# Altium PCB CRF18-1.PcbDoc (part 1 of 2)
Units mm, origin at the board's own origin, x right, y up, seen from the top; angles counter-clockwise.
Board outline 161.4 x 100 mm, 4 copper layers (Top Layer, Internal Plane 1, Internal Plane 2, Bottom Layer), stack 1.503 mm thick; 213 components, 165 nets, 674 pads, 349 vias.
Unrouted connection lines stored in the file: 9.
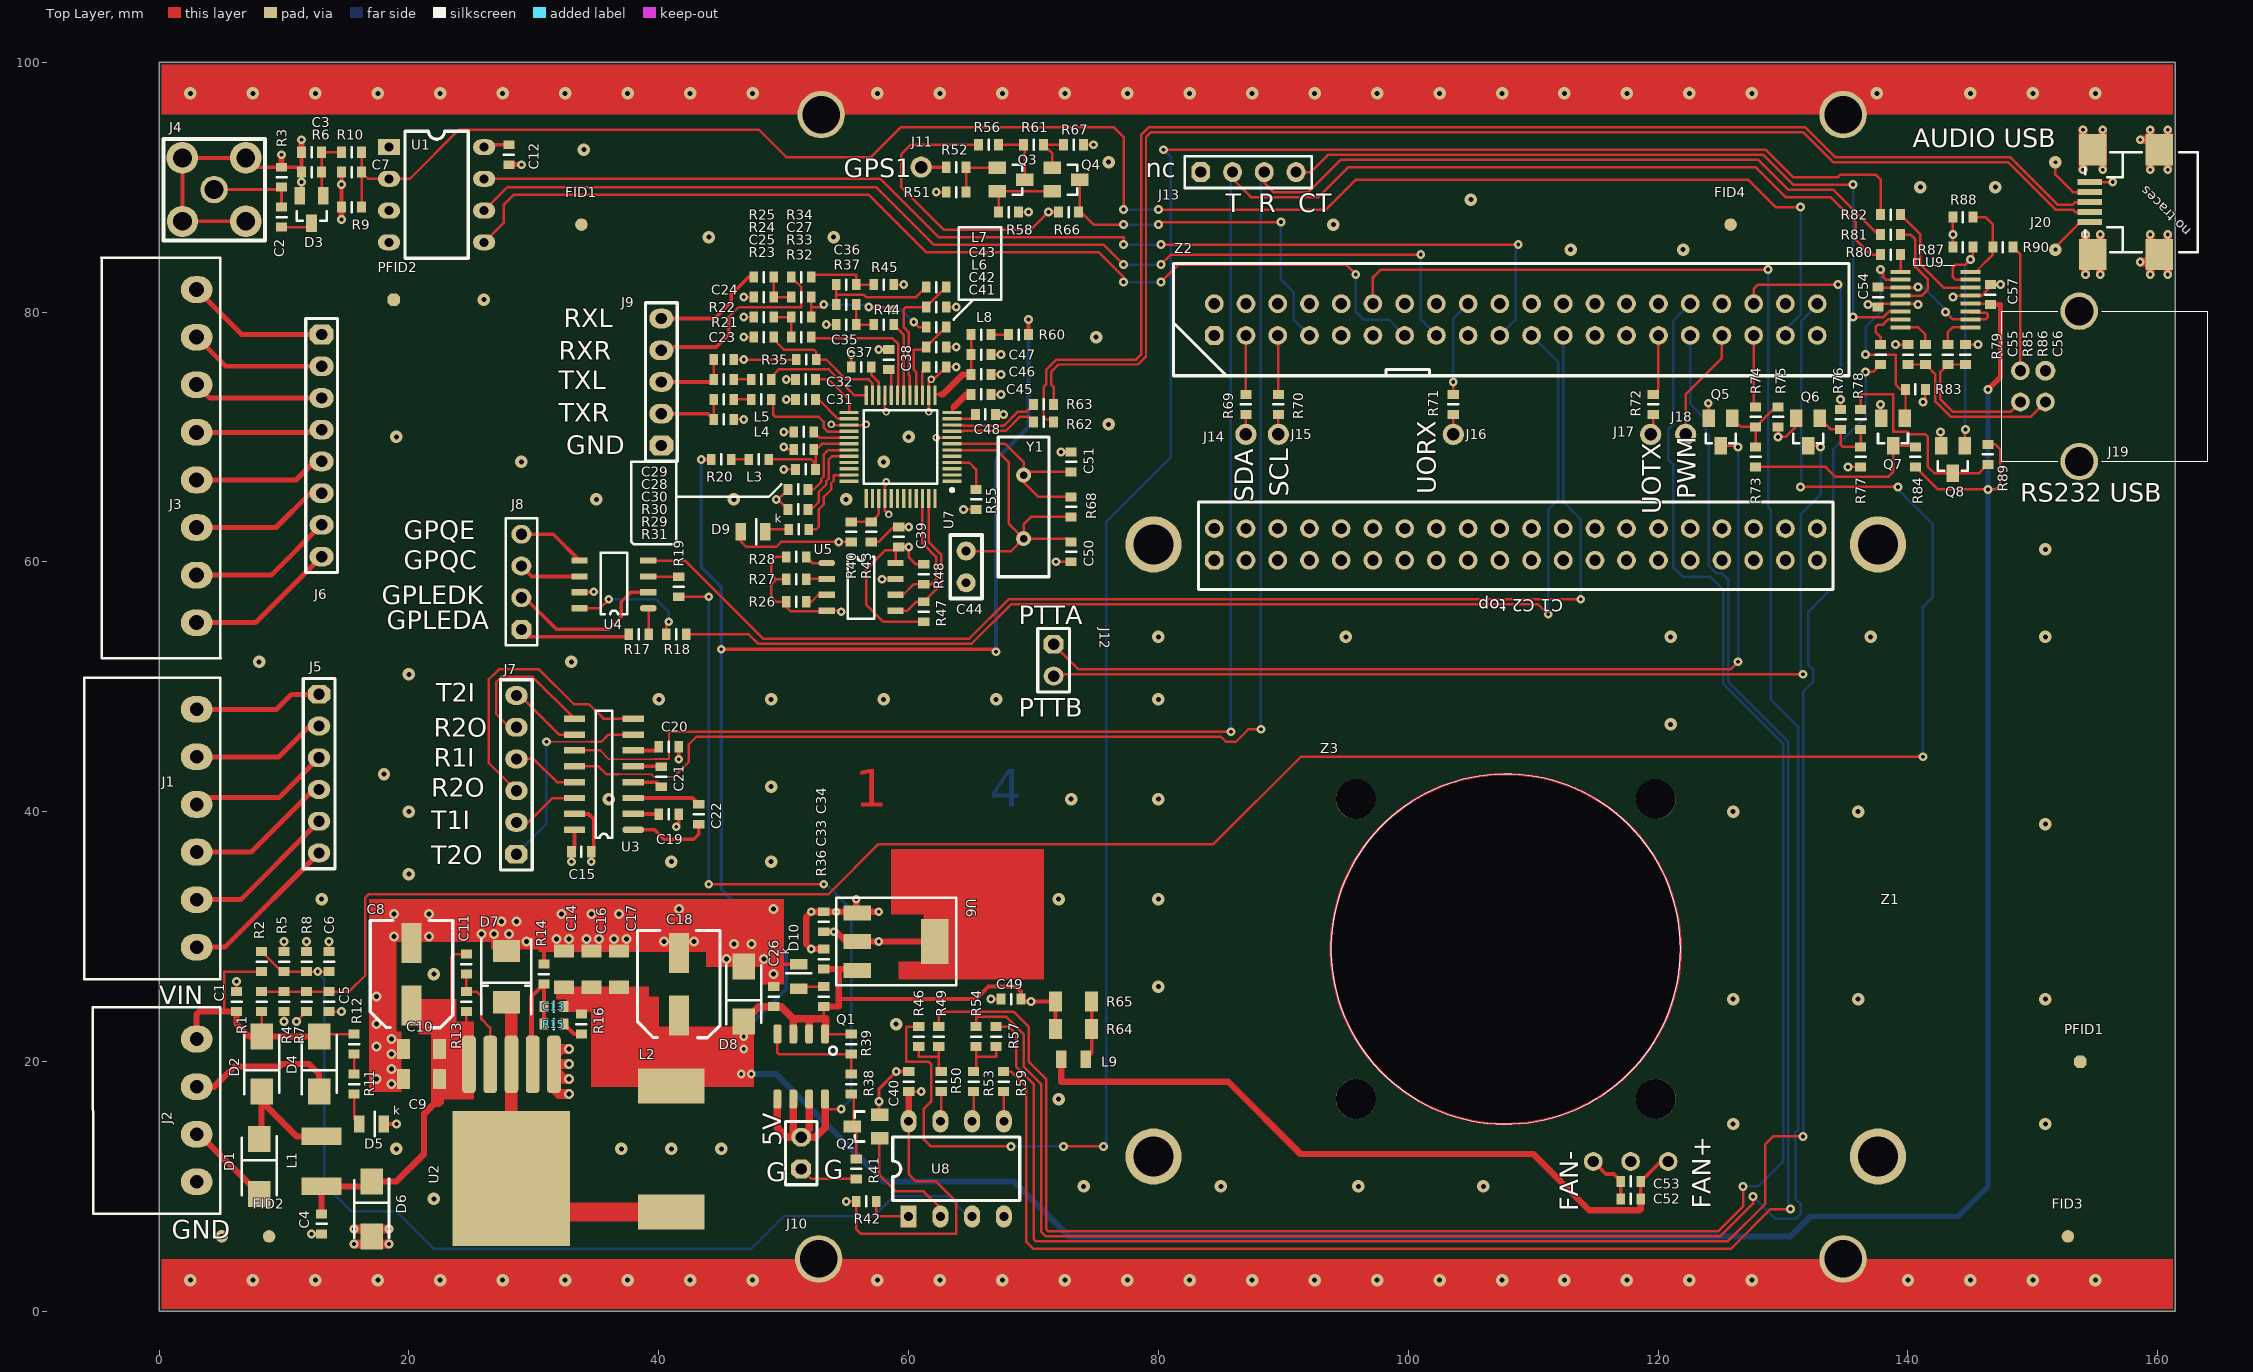
[diagram p0: Top Layer view]
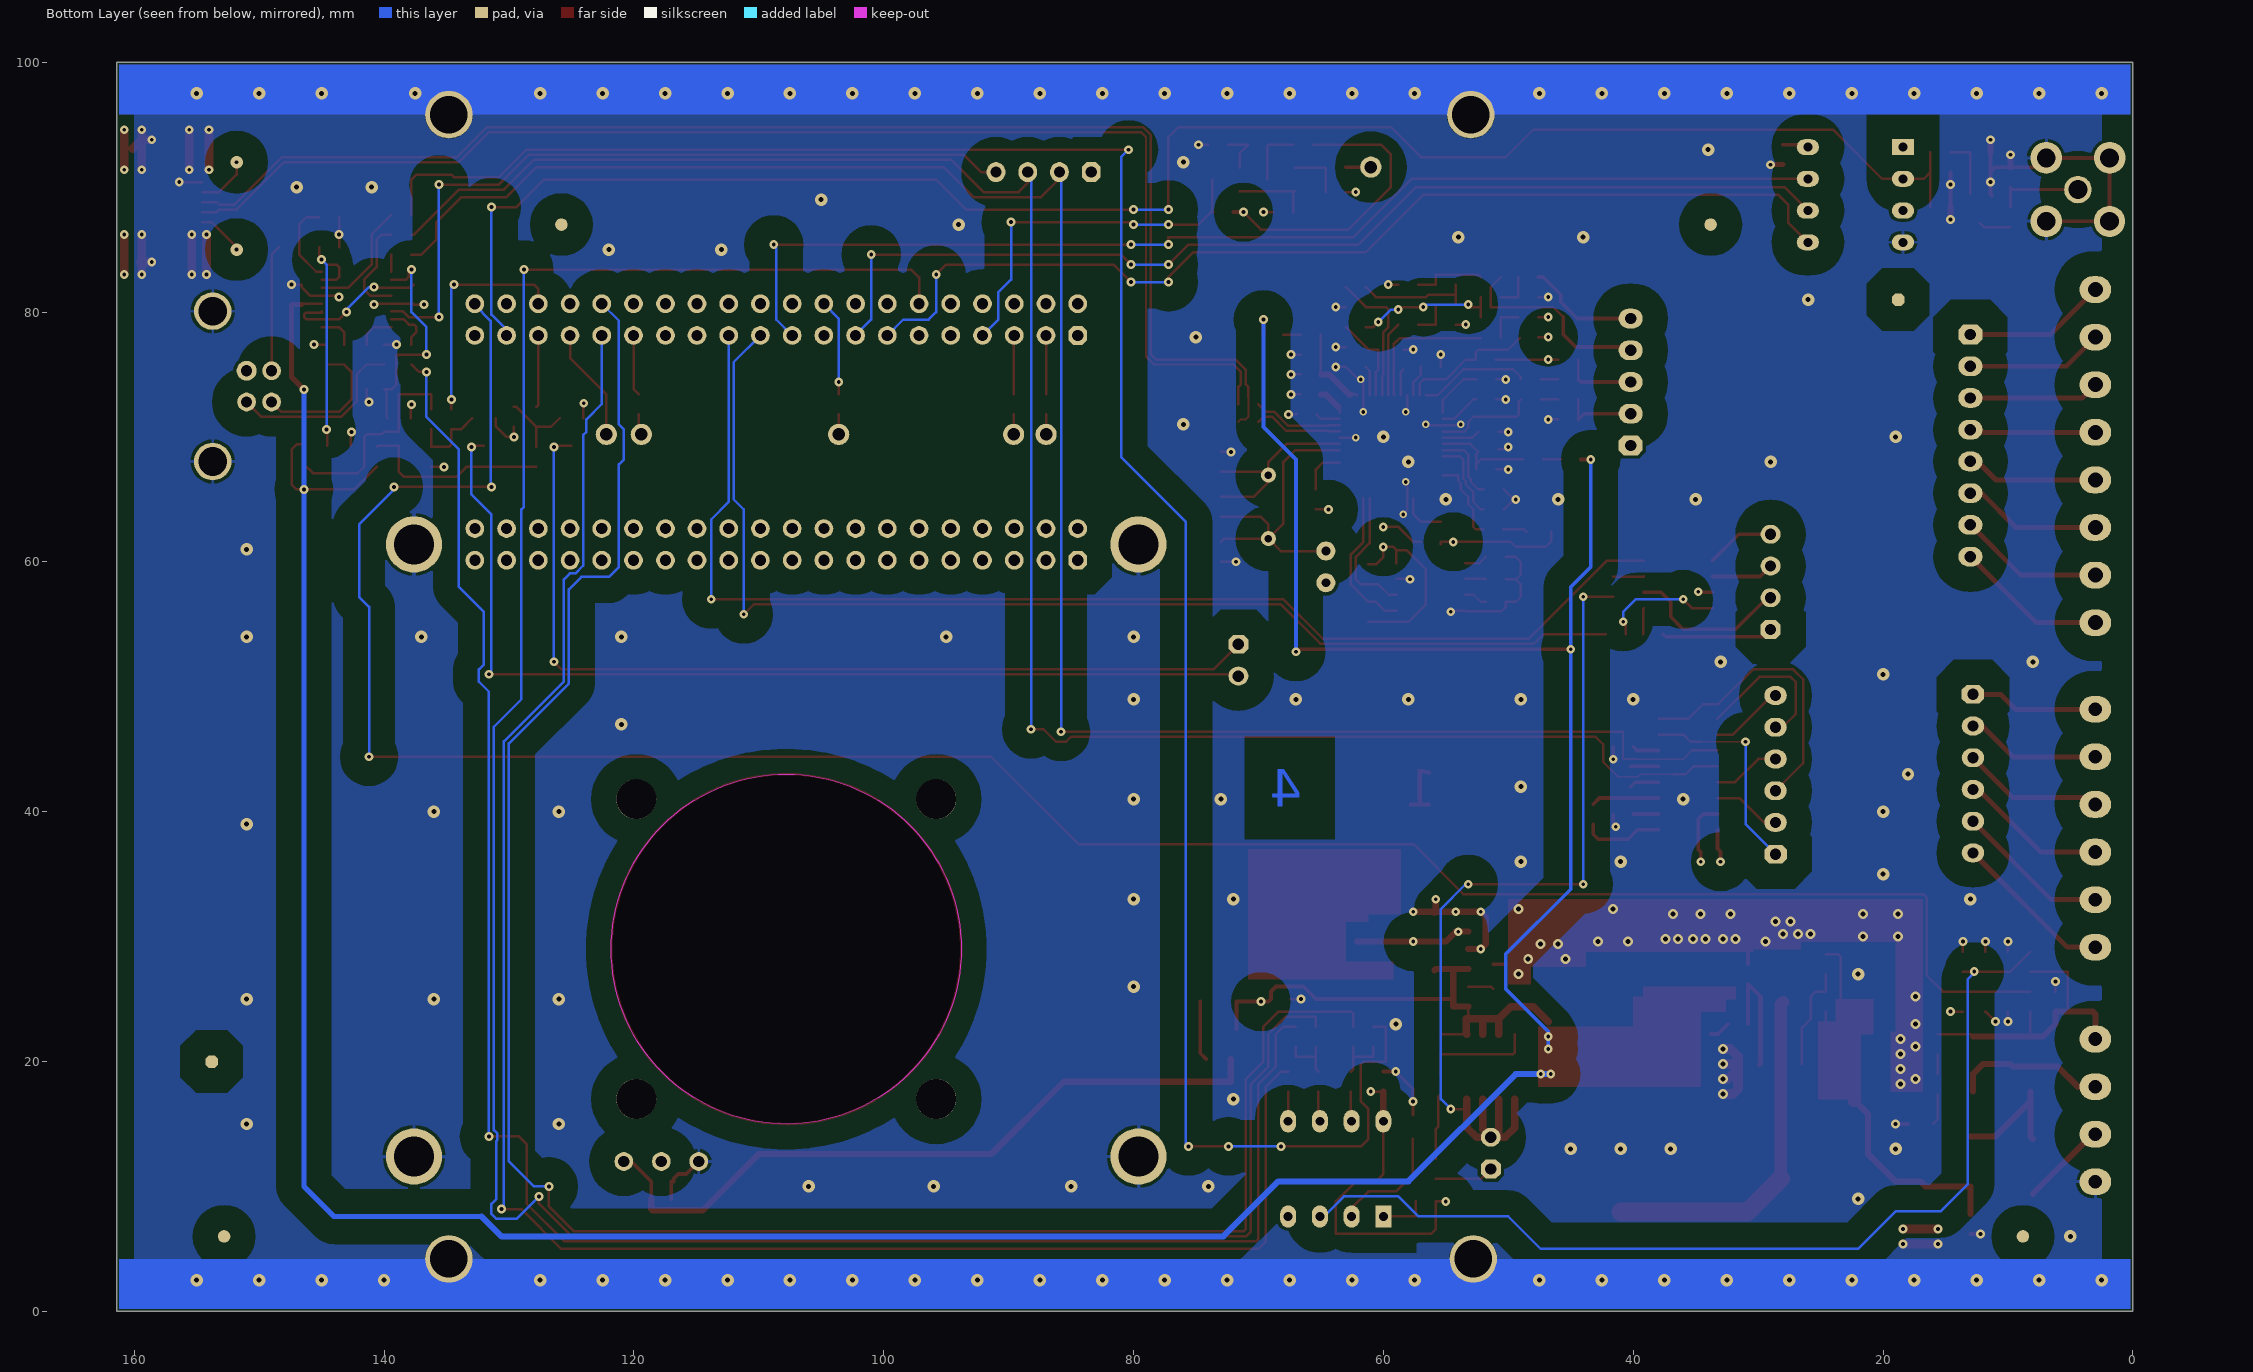
[diagram p1: Bottom Layer view, seen from below]
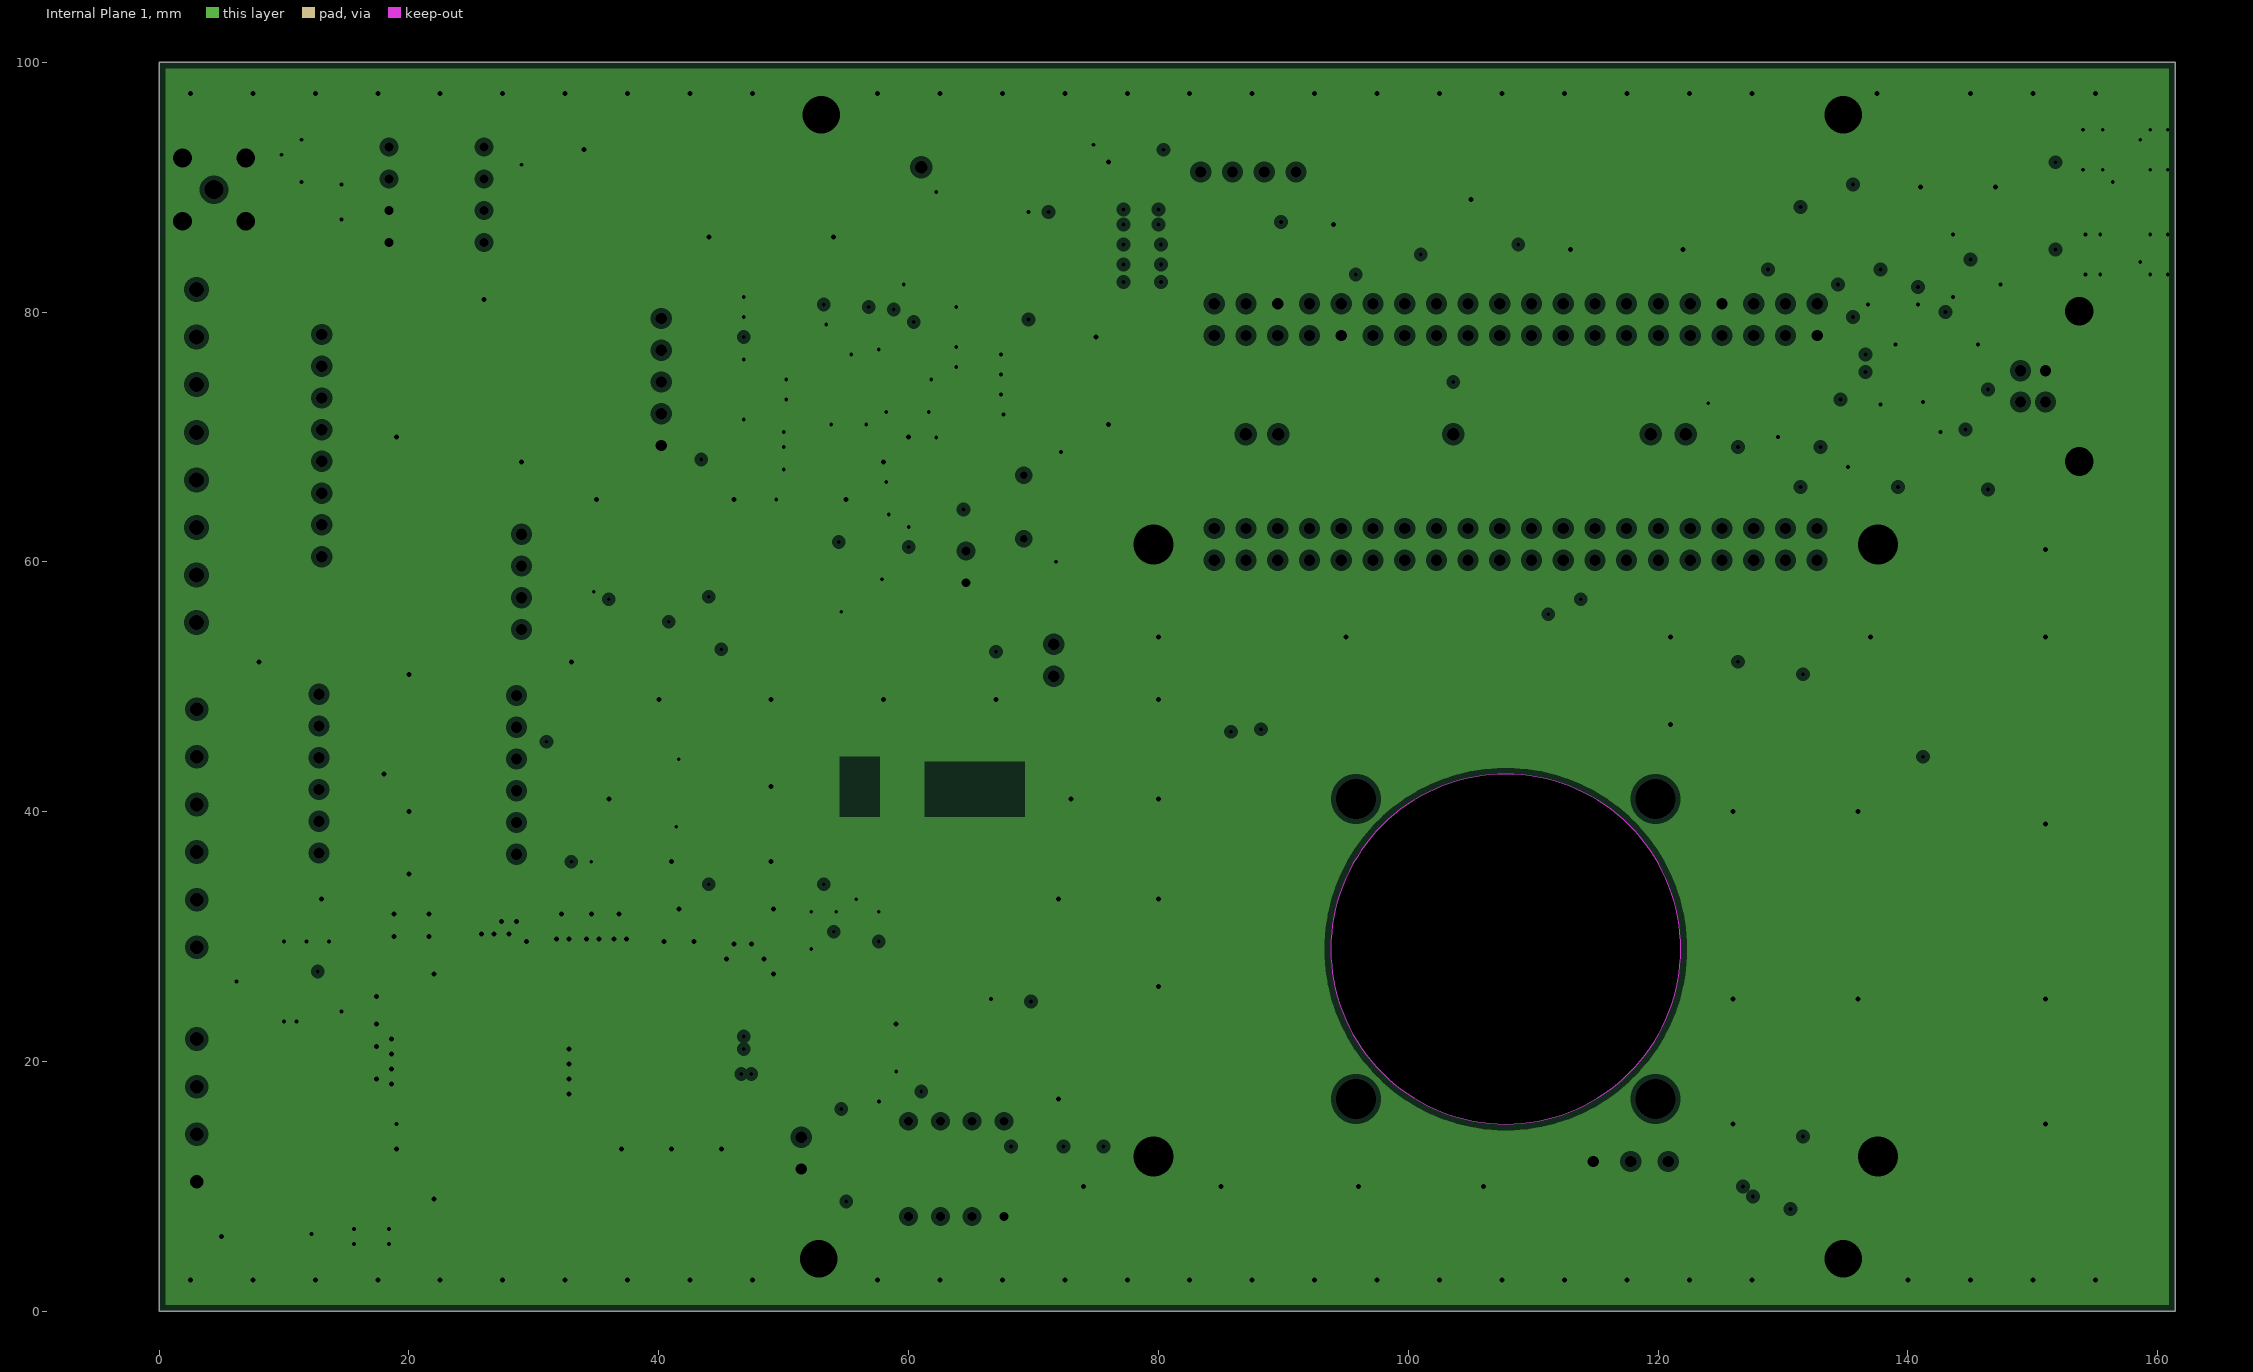
[diagram p2: Internal Plane 1, clearances drawn from the general rule]
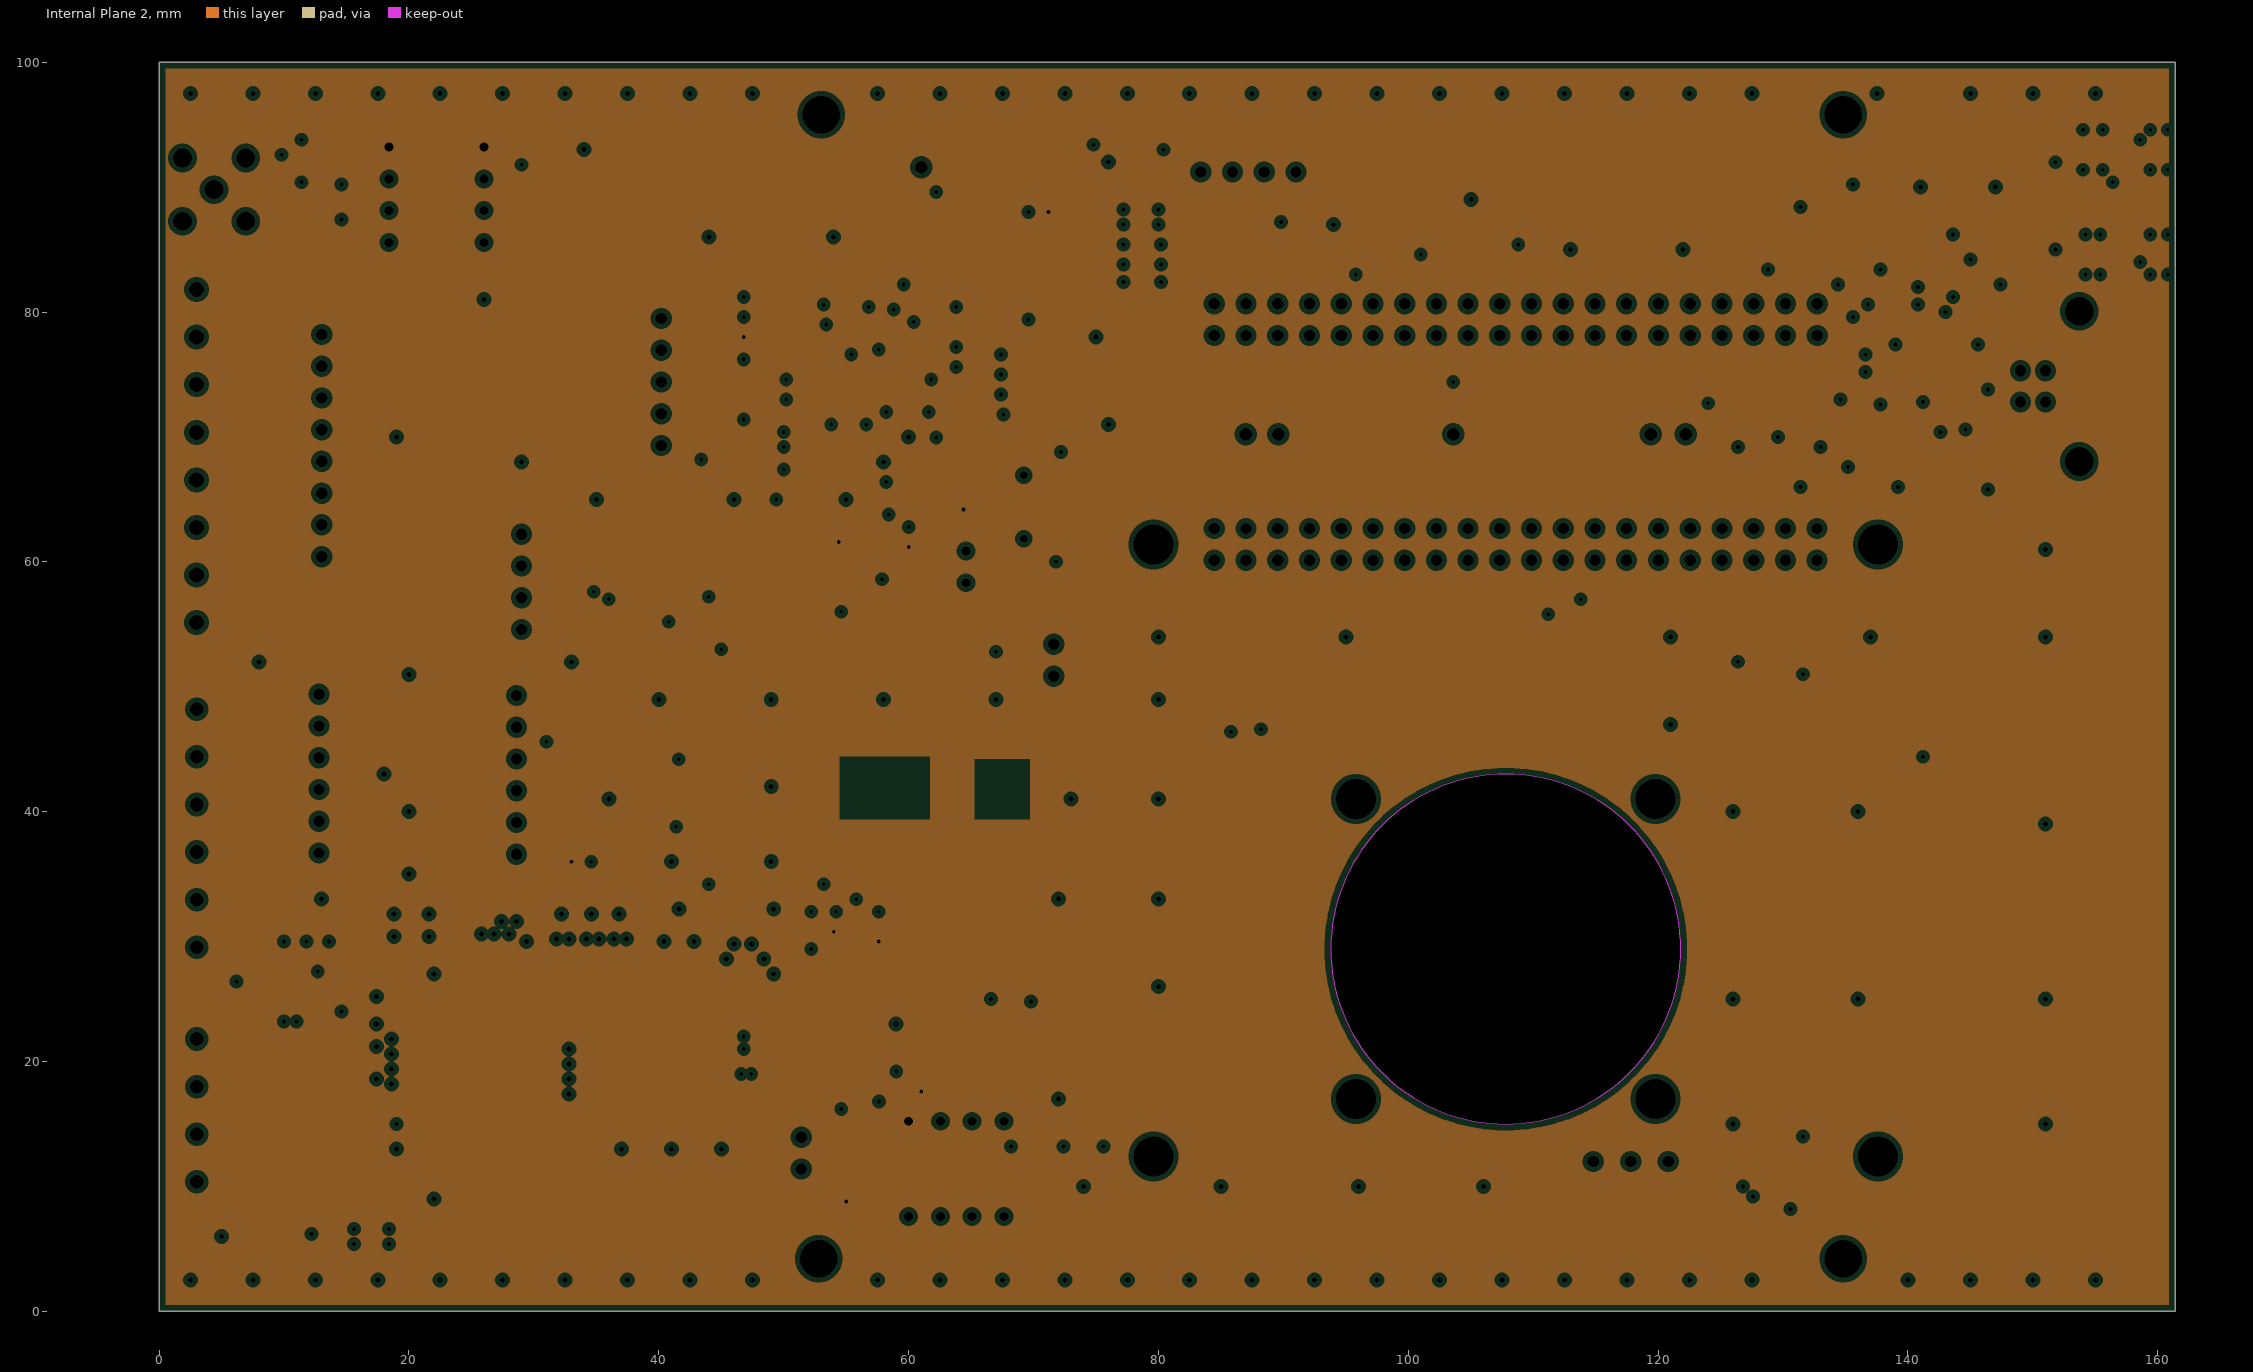
[diagram p3: Internal Plane 2, clearances drawn from the general rule]

## Layer stack, top to bottom
Top Solder: solder mask 0.0102, Solder Resist, Dk 3.5
Top Layer: signal copper 0.0356
Dielectric 1: core 0.18, FR-4, Dk 4.2
Internal Plane 1: plane copper 0.036, net GND
Dielectric 3: prepreg 1, FR-4, Dk 4.2
Internal Plane 2: plane copper 0.036, net 3V3
Dielectric 2: core 0.18, FR-4, Dk 4.2
Bottom Layer: signal copper 0.0356
Bottom Solder: solder mask 0.0102, Solder Resist, Dk 3.5

## Board outline
0,0 0,100 161.4,100 161.4,0
cut-out: 93.794,29 ccw(c107.8,29) 107.8,14.994 ccw(c107.8,29) 121.806,29 ccw(c107.8,29) 107.8,43.006 ccw(c107.8,29)

## Design rules (kind name [scope] priority, off if disabled: settings)
Clearance "in poly_1" [InPolygon] p1: gap=2 ignorepadtopadclearanceinfootprint=FALSE
Clearance Clearance_1 [not InPolygon] p2: gap=0.2 ignorepadtopadclearanceinfootprint=FALSE except(0: Arc-Hole Track-Hole SMDPad-Hole THPad-Hole Via-Hole Fill-Hole Poly-Hole Region-Hole Text-Hole)
ComponentClearance [All] p1 off: gap=0.254 collisioncheckmode=3 verticalgap=0.254 showdistances=FALSE
DiffPairsRouting DiffPairsRouting_1 [All] p1: maxlimit=100 minlimit=0.2 mostfreqgap=0.2 toplayer_minwidth=0.15 toplayer_maxwidth=0.2 toplayer_prefwidth=0.2 bottomlayer_minwidth=0.15 bottomlayer_maxwidth=0.2 bottomlayer_prefwidth=0.2 maxuncoupledlength=100
Height [All] p1 off: minheight=0 maxheight=25.4 prefheight=12.7
HoleSize [All] p1: absolutevalues=TRUE maxlimit=5 minlimit=0.2 maxpercent=80.000 minpercent=20.000
MinimumAnnularRing [All] p1: minimumring=0.15
MinimumSolderMaskSliver [All] p1: minsoldermaskwidth=0.05
MinimumSolderMaskSliver SilkscreenOverComponentPads [All] p2: minsoldermaskwidth=0.254
PlaneClearance [All] p1: clearance=0.4
PlaneConnect PlaneConnectVia [IsVia] p1: planeconnectstyle=Direct reliefexpansion=0.508 reliefentries=4 reliefconductorwidth=0.254 reliefairgap=0.254
PlaneConnect PlaneConnectPin [IsComponentVia Or IsComponentPad] p2: planeconnectstyle=Relief reliefexpansion=0.508 reliefentries=4 reliefconductorwidth=0.254 reliefairgap=0.254
PolygonConnect PolygonConnectPad [IsComponentPad] p1: connectstyle=Relief reliefconductorwidth=0.254 reliefentries=4 polygonreliefangle="90 Angle" airgapwidth=0.254
PolygonConnect PolygonConnectvIA [IsVia] p2: connectstyle=Direct reliefconductorwidth=0.254 reliefentries=4 polygonreliefangle="90 Angle" airgapwidth=0.254
RoomDefinition main [InComponentClass('main')] p1: confinementstyle=ConfineIn formatcopy=TRUE lockcomponents=FALSE outline -60.8,-27 -10,-27 -10,-1.6 -60.8,-1.6
RoutingVias [All] p1: holewidth=0.3 width=0.7 viastyle="Through Hole" minholewidth=0.3 minwidth=0.6 maxholewidth=2 maxwidth=10
ShortCircuit ShortCircuit_1 [HasFootprint('mousebite')] p1: allowed=TRUE
ShortCircuit [All] p2: allowed=FALSE
SilkToSolderMaskClearance [IsPad] p1: minsilkscreentomaskgap=0.15 clearancetoexposedcopper=FALSE
SolderMaskExpansion [All] p1: expansion=0.102
Width [All] p1: maxlimit=10 minlimit=0.15 preferedwidth=0.2 minimp=50.000000 maximp=50.000000 favimp=50.000000
21 further rules are at their usual default settings.

## Classes and differential pairs
differential pair AUSD: +AUSD_P -AUSD_N
differential pair D: +D_P -D_N
differential pair AUD: +AUD_P -AUD_N

## Components (designator, comment, footprint, x,y, rotation, side; value= is the part's Value field where it differs from the comment)
C1 "100n 50V" 0603C 6.2,24.8 r90 top (schematic designator C11)
C2 "10n" 0603C 9.8,87.6 r270 top (schematic designator C51)
C3 "10n" 0603C 12.2,92.8 r180 top (schematic designator C53)
C4 "100n 50V" 0603C 13,7 r270 top (schematic designator C12)
C5 "100n" 0603C 13.6,24.8 r270 top (schematic designator C26)
C6 "100n" 0603C 13.6,28 r90 top (schematic designator C22)
C7 "1n" 0603C 15.4,91.2 r0 top (schematic designator C54)
C8 "47u 35V" D_CASE_ELECTRO 20.2,27 r270 top (schematic designator C6)
C9 "4u7 50V" 1206C 21,18.6 r180 top (schematic designator C14)
C10 "4u7 50V" 1206C 21,21 r180 top (schematic designator C13)
C11 "DNF" 0603C 24.6,27.8 r270 top (schematic designator C4)
C12 "100n" 0603C 28,92.6 r270 top (schematic designator C52)
C13 "33n" 0603C 31.6,24.4 r180 top (schematic designator C7)
C14 "47u 10V" 1206C 32.4,27.4 r90 top (schematic designator C8)
C15 "100n" 0603C 33.8,36.8 r0 top (schematic designator C23)
C16 "47u 10V" 1206C 34.6,27.4 r90 top (schematic designator C9)
C17 "47u 10V" 1206C 36.8,27.4 r90 top (schematic designator C10)
C18 "47u 35V" D_CASE_ELECTRO 41.6,26.2 r270 top (schematic designator C1)
C19 "100n" 0603C 40.8,39.8 r180 top (schematic designator C25)
C20 "100n" 0603C 40.8,45.2 r180 top (schematic designator C24)
C21 "100n" 0603C 40.2,42.8 r90 top
C22 "100n" 0603C 43.2,39.8 r90 top (schematic designator C20)
C23 "1n" 0603C 45.2,71.4 r0 top (schematic designator C40)
C24 "1n" 0603C 45.2,76.2 r0 top (schematic designator C39)
C25 "1u 10V" 0603C 48.4,79.6 r180 top (schematic designator C50)
C26 "10n" 0603C 49.2,25.2 r90 top (schematic designator C2)
C27 "1u 10V" 0603C 51.4,81.2 r180 top (schematic designator C46)
C28 "100n" 0603C 51.6,69 r0 top (schematic designator C31)
C29 "100n" 0603C 51.6,70.4 r180 top (schematic designator C37)
C30 "1u 10V" 0603C 51.75,67.4 r0 top (schematic designator C32)
C31 "100n" 0603C 51.75,73 r180 top (schematic designator C36)
C32 "100n" 0603C 51.75,74.6 r180 top (schematic designator C33)
C33 "100n" 0603C 53.2,28.2 r90 top (schematic designator C5)
C34 "1u 10V" 0603C 53.2,31.2 r90 top (schematic designator C3)
C35 "1u 10V" 0603C 55,79 r180 top (schematic designator C49)
C36 "1u 10V" 0603C 55,82.2 r0 top (schematic designator C45)
C37 "100n" 0603C 56.2,75.6 r180 top (schematic designator C43)
C38 "100n" 0603C 58.4,76.2 r90 top (schematic designator C41)
C39 "100n" 0603C 59.2,62 r270 top (schematic designator C27)
C40 "100n" 0603C 60,18.4 r90 top (schematic designator C15)
C41 "100n" 0603C 62.2,75.6 r0 top (schematic designator C42)
C42 "100p" 0603C 62.2,77.2 r0 top (schematic designator C48)
C43 "100p" 0603C 62.2,80.4 r0 top (schematic designator C47)
C44 "10p" CAP0.1 64.6,59.6 r0 top (schematic designator C28)
C45 "100n" 0603C 65.8,73.4 r0 top (schematic designator C35)
C46 "100n" 0603C 65.8,75 r180 top (schematic designator C38)
C47 "1u 10V" 0603C 65.8,76.6 r180 top (schematic designator C44)
C48 "100n" 0603C 66.15,71.8 r0 top (schematic designator C34)
C49 "100n" 0603C 68.2,25 r180 top (schematic designator C57)
C50 "33p" 0603C 73,60.8 r270 top (schematic designator C29)
C51 "33p" 0603C 73,68 r90 top (schematic designator C30)
C52 "100n" 0603C 117.8,9 r180 top (schematic designator C55)
C53 "100n" 0603C 117.8,10.4 r180 top (schematic designator C56)
C54 "100n" 0603C 137.6,81.2 r270 top (schematic designator C19)
C55 "47p" 0603C 140,76.6 r270 top (schematic designator C18)
C56 "47p" 0603C 144.6,76.6 r270 top (schematic designator C17)
C57 "1u 10V" 0603C 146.6,81.4 r90 top (schematic designator C16)
D1 "SS14" SMA_DIODE 8,11.6 r0 top (schematic designator D7)
D2 "SS14" SMA_DIODE 8.2,19.8 r180 top (schematic designator D4)
D3 "BAT721S" SOT23 12.2,88.2 r180 top (schematic designator D10)
D4 "SS14" SMA_DIODE 12.8,19.8 r180 top (schematic designator D8)
D5 "LED" 0805LED 17,15 r0 top (schematic designator D2)
D6 "SMAJ30A" SMA_DIODE 17,8.2 r0 top
D7 "B340" SMB_diode 27.8,26.8 r90 top (schematic designator D3)
D8 "SMAJ5A" SMA_DIODE 46.8,25.4 r180 top (schematic designator D1)
D9 "LED" 0805LED 47.55,62.4 r0 top
D10 "LED" 0805LED 51.2,26.8 r90 top (schematic designator D5)
FID1 "FIDUCIAL" FIDUCIAL 33.8,87 r0 top
FID2 "FIDUCIAL" FIDUCIAL 8.8,6 r0 top
FID3 "FIDUCIAL" FIDUCIAL 152.8,6 r0 top
FID4 "FIDUCIAL" FIDUCIAL 125.8,87 r0 top
J1 "CON6" SL3.81/6/90G 3,48.2 r270 top (schematic designator J23)
J2 "CON4" SL3.81/4/90G 3,21.8 r270 top
J3 "CON8" SL3.81/8/90G 3,81.8 r270 top (schematic designator J21)
J4 "Conn" SMA_COMPACT_VERTICAL_PCB 4.4,89.8 r0 top (schematic designator J18)
J5 "CON6" HDR1X6 12.8,49.4 r270 top (schematic designator J22)
J6 "CON8" HDR1X8 13,78.2 r270 top (schematic designator J20)
J7 "CON6" HDR1X6 28.6,36.6 r90 top (schematic designator J8)
J8 "CON4" HDR1X4 29,58.4 r90 top (schematic designator J17)
J9 "CON5" HDR1X5 40.2,74.4 r90 top (schematic designator J24)
J10 "CON2" HDR1X2 51.4,11.4 r90 top (schematic designator J1)
J11 "GPSPPS" GPPAD 61,91.6 r0 top (schematic designator J12)
J12 "CON2" HDR1X2 71.6,53.4 r270 top (schematic designator J4)
J13 "HDR1X4" HDR1X4 87.2,91.2 r0 top (schematic designator J3)
J14 "SDA" GPPAD 87,70.2 r0 top (schematic designator J11)
J15 "SCL" GPPAD 89.6,70.2 r0 top (schematic designator J13)
J16 "UARTRX" GPPAD 103.6,70.2 r0 top (schematic designator J14)
J17 "UARTTX" GPPAD 119.4,70.2 r0 top (schematic designator J16)
J18 "TP" GPPAD 122.2,70.2 r0 top (schematic designator J19)
J19 "USB_B_SKT_90" USB_B_SKT_90 149,72.8 r90 top locked (schematic designator J5)
J20 "MiniBMolex5000750517" USB_UX60A-MB-5ST 163.2,88.8 r90 top (schematic designator J15)
L1 "choke" 1812L 13,12 r270 top (schematic designator L2)
L2 "SRR1210-470M" BOURNS_SRR1210 41,13 r0 top (schematic designator L1)
L3 "choke" 0603L 48,68.2 r180 top
L4 "choke" 0603L 48.2,73 r180 top
L5 "choke" 0603L 48.2,74.6 r180 top
L6 "choke" 0603L 62.2,78.8 r180 top (schematic designator L8)
L7 "choke" 0603L 62.2,82 r180 top
L8 "choke" 0603L 65.8,78.2 r180 top (schematic designator L6)
L9 "TY" 0805L 73.2,20.2 r180 top
PFID1 "PASTEFID" FIDUCIAL_PASTE 153.8,20 r0 top
PFID2 "PASTEFID" FIDUCIAL_PASTE 18.8,81 r0 top
Q1 "AO4407" SO8FET 51.4,19.6 r270 top
Q2 "AO3400" FDV-301N_SOT23 56.6,14.8 r90 top
Q3 "AO3400" FDV-301N_SOT23 68.2,90.6 r270 top (schematic designator Q8)
Q4 "AO3400" FDV-301N_SOT23 72.6,90.6 r270 top (schematic designator Q7)
Q5 "AO3400" FDV-301N_SOT23 125,70.4 r180 top (schematic designator Q4)
Q6 "AO3400" FDV-301N_SOT23 132,70.4 r180 top
Q7 "AO3400" FDV-301N_SOT23 138.8,70.4 r180 top (schematic designator Q3)
Q8 "AO3400" FDV-301N_SOT23 143.6,68.2 r180 top (schematic designator Q5)
R1 "10k" 0603R 8.2,24.8 r90 top (schematic designator R40)
R2 "10k" 0603R 8.2,28 r90 top (schematic designator R34)
R3 "47" 0603R 9.8,90.8 r90 top (schematic designator R88)
R4 "1k" 0603R 10,24.8 r90 top (schematic designator R41)
R5 "1k" 0603R 10,28 r270 top (schematic designator R35)
R6 "47k" 0603R 12.2,91.2 r180 top (schematic designator R86)
R7 "1k" 0603R 11.8,24.8 r90 top (schematic designator R42)
R8 "1k" 0603R 11.8,28 r270 top (schematic designator R36)
R9 "DNF" 0603R 15.4,88.4 r180 top (schematic designator R87)
R10 "1k" 0603R 15.4,92.8 r180 top (schematic designator R85)
R11 "1k" 0603R 15.6,18.2 r270 top (schematic designator R2)
R12 "1k" 0603R 15.6,21.4 r270 top (schematic designator R1)
R13 "27" 0603R 24.6,24.8 r270 top (schematic designator R3)
R14 "2k2" 0603R 30.8,27 r90 top (schematic designator R10)
R15 "10k" 0603R 31.6,23 r180 top (schematic designator R7)
R16 "1k7" 0603R 33.8,23 r270 top (schematic designator R5)
R17 "470" 0603R 38.4,54.2 r0 top (schematic designator R75)
R18 "470" 0603R 41.4,54.2 r0 top (schematic designator R74)
R19 "2k2" 0603R 41.6,58 r90 top (schematic designator R77)
R20 "10" 0603R 45,68.2 r0 top (schematic designator R64)
R21 "1k" 0603R 45.2,73 r0 top (schematic designator R68)
R22 "1k" 0603R 45.2,74.6 r0 top (schematic designator R70)
R23 "DNF" 0603R 48.4,78 r0 top (schematic designator R73)
R24 "4k7" 0603R 48.4,81.2 r180 top (schematic designator R79)
R25 "1k" 0603R 48.4,82.8 r180 top (schematic designator R78)
R26 "0R" 0603R 51,56.8 r0 top (schematic designator R54)
R27 "0R" 0603R 51,58.6 r0 top (schematic designator R53)
R28 "0R" 0603R 51,60.4 r0 top (schematic designator R52)
R29 "DNF" 0603R 51.15,64.2 r0 top (schematic designator R62)
R30 "DNF" 0603R 51.15,65.8 r0 top (schematic designator R63)
R31 "470" 0603R 51.2,62.6 r0 top (schematic designator R61)
R32 "1k" 0603R 51.4,78 r180 top (schematic designator R83)
R33 "4k7" 0603R 51.4,79.6 r0 top (schematic designator R84)
R34 "1k" 0603R 51.4,82.8 r180 top (schematic designator R76)
R35 "DNF" 0603R 51.8,76.2 r180 top (schematic designator R72)
R36 "1k" 0603R 53.2,25.2 r90 top (schematic designator R4)
R37 "4k7" 0603R 55,80.6 r180 top (schematic designator R82)
R38 "100" 0603R 55.4,18.2 r270 top (schematic designator R8)
R39 "10k" 0603R 55.4,21.4 r270 top (schematic designator R6)
R40 "DNF" 0603R 55.4,62.4 r90 top (schematic designator R48)
R41 "DNF" 0603R 55.8,11.4 r270 top (schematic designator R9)
R42 "47k" 0603R 56.6,8.8 r0 top (schematic designator R13)
R43 "DNF" 0603R 57,62.4 r270 top (schematic designator R49)
R44 "1k" 0603R 58,79 r180 top (schematic designator R81)
R45 "4k7" 0603R 58,82.2 r0 top (schematic designator R80)
R46 "DNF" 0603R 60.8,22 r270 top (schematic designator R12)
R47 "4k7" 0603R 61.2,56 r90 top (schematic designator R45)
R48 "4k7" 0603R 61.2,59 r270 top (schematic designator R46)
R49 "DNF" 0603R 62.4,22 r90 top (schematic designator R11)
R50 "100" 0603R 62.6,18.4 r90 top (schematic designator R14)
R51 "1k" 0603R 63.8,89.6 r180 top (schematic designator R56)
R52 "1k" 0603R 63.8,91.6 r180 top (schematic designator R51)
R53 "100" 0603R 65.2,18.4 r90 top (schematic designator R15)
R54 "DNF" 0603R 65.4,22 r90 top (schematic designator R19)
R55 "10k" 0603R 65.4,65 r90 top (schematic designator R60)
R56 "4k7" 0603R 66.4,93.4 r0 top (schematic designator R43)
R57 "DNF" 0603R 67,22 r270 top (schematic designator R20)
R58 "220" 0603R 68,88 r0 top (schematic designator R57)
R59 "100" 0603R 67.6,18.4 r90 top (schematic designator R16)
R60 "10" 0603R 68.8,78.2 r0 top (schematic designator R71)
R61 "220" 0603R 70,93.4 r180 top (schematic designator R47)
R62 "27" 0603R 70.8,71.2 r0 top (schematic designator R66)
R63 "27" 0603R 70.8,72.6 r0 top (schematic designator R67)
R64 "10" 1206R 73.2,22.6 r180 top (schematic designator R90)
R65 "10" 1206R 73.2,24.8 r180 top (schematic designator R89)
R66 "4k7" 0603R 72.8,88 r0 top (schematic designator R44)
R67 "100k" 0603R 73.2,93.4 r0 top (schematic designator R58)
R68 "1M" 0603R 73,64.4 r270 top (schematic designator R59)
R69 "27" 0603R 87,72.6 r270 top (schematic designator R50)
R70 "27" 0603R 89.6,72.6 r270 top (schematic designator R55)
R71 "100" 0603R 103.6,72.6 r90 top (schematic designator R65)
R72 "100" 0603R 119.6,72.6 r270 top (schematic designator R69)
R73 "DNF" 0603R 127.8,68.4 r90 top (schematic designator R23)
R74 "0R" 0603R 127.8,71.6 r90 top (schematic designator R28)
R75 "10k" 0603R 129.6,71.6 r270 top (schematic designator R29)
R76 "0R" 0603R 134.6,71.4 r90 top (schematic designator R38)
R77 "10k" 0603R 136.2,68.4 r270 top (schematic designator R39)
R78 "DNF" 0603R 136.2,71.4 r270 top (schematic designator R33)
R79 "100" 0603R 137.8,76.6 r270 top (schematic designator R32)
R80 "100" 0603R 138.6,84.6 r0 top (schematic designator R17)
R81 "100" 0603R 138.6,86.2 r0 top (schematic designator R21)
R82 "100" 0603R 138.6,87.8 r0 top (schematic designator R30)
R83 "10k" 0603R 140.6,73.8 r180 top (schematic designator R26)
R84 "10k" 0603R 140.6,68.4 r90 top (schematic designator R18)
R85 "27" 0603R 141.4,76.6 r270 top (schematic designator R25)
R86 "27" 0603R 143.2,76.6 r270 top (schematic designator R24)
R87 "10k" 0603R 144.4,85.2 r0 top (schematic designator R37)
R88 "10k" 0603R 144.4,87.6 r180 top (schematic designator R27)
R89 "10k" 0603R 146.4,68.6 r270 top (schematic designator R31)
R90 "4k7" 0603R 147.6,85.2 r180 top (schematic designator R22)
U1 "MCP3201" DIP8 18.4,93.2 r0 top (schematic designator U9)
U2 "XL4005" TO263-5 28.2,15.2 r0 top
U3 "MAX3232" SO16 35.6,43 r180 top (schematic designator U5)
U4 "OPTO DUAL ILD213" SO8 36.4,58.2 r180 top (schematic designator U8)
U5 "24LC32" SO8 56.2,58 r0 top (schematic designator U6)
U6 "AMS1117-3.3" SOT223 59,29.6 r270 top (schematic designator U1)
U7 "CM6500B" QFP48_7x7 59.35,69.2 r180 top
U8 "ATTINY13" DIP8 60,7.6 r90 top (schematic designator U3)
U9 "FT230XS" TSSOP16 142.2,81 r270 top (schematic designator U4)
Y1 "12M0" HC49 69.2,64.4 r90 top
Z1 "ODROIDC1" ODROID_C1 79.6,61.4 r180 top locked
Z2 "HEADER 20X2" HDR2X20_100MIL 84.467,78.126 r0 top locked (schematic designator Z47)
Z3 "fan" FAN_SUNON_MC3006 122.8,14 r90 top locked (schematic designator Z2)

## Footprints (in the part's own frame and the unit in brackets; to place one, negate y for a bottom-side part, rotate by r counter-clockwise, add the part's x,y. Pads: shape width x height; smd on the part's side, far side on the other; paste and mask are expansions set on the pad)
0603C [mm] "0603 capacitor"
  rect 0.7x0.9 smd: 1(-0.8,0) 2(0.8,0)
  silkscreen extent 0,-0.4 0,0.4, body extent -0.85,-0.45 0.85,0.45, height 1
0603L [mm] "0603 inductor"
  rect 0.7x0.9 smd: 1(-0.8,0) 2(0.8,0)
  silkscreen extent 0,-0.4 0,0.4, body extent -0.85,-0.45 0.85,0.45, height 1
0603R [mm] "0603resistor"
  rect 0.7x0.9 smd: 1(-0.8,0) 2(0.8,0)
  silkscreen extent 0,-0.4 0,0.4, body extent -0.85,-0.45 0.85,0.45, height 1
0805L [mm] "0805  inductor"
  rect 0.85x1.4 smd: 1(-0.985,0) 2(0.985,0)
  body extent -1.05,-0.65 1.05,0.65, height 1.25
0805LED [mm] "0805 LED"
  rect 0.85x1.4 smd: A(-0.985,0) K(0.985,0)
  silkscreen extent 0.25,-1 0.25,1, body extent -1.05,-0.65 1.05,0.65, height 1.25
1206C [mm]
  rect 1.05x1.6 smd: 1(-1.45,0) 2(1.45,0)
  body extent -1.6,-0.8 1.6,0.8, height 0.55
1206R [mm]
  rect 1.05x1.6 smd: 1(-1.45,0) 2(1.45,0)
  body extent -1.6,-0.8 1.6,0.8, height 0.55
1812L [mm] "1812 L"
  rect 1.4x3.2 smd: 1(-2,0) 2(2,0)
  body extent -2.3,-1.6 2.3,1.6, height 2.54
BOURNS_SRR1210 [mm] "inductor"
  rect 5.3x2.8 smd: 1(0,-5.05) 2(0,5.05)
  body extent -6,-6 6,6, height 10
CAP0.1 [mil]
  round 60 hole 28: 1(0,-50) 2(0,50)
  silkscreen extent -50,-100 50,100
D_CASE_ELECTRO [mm]
  rect 3.2x1.6 smd: 1(2.5,0) 2(-2.5,0)
  silkscreen extent -4.3,-3.3 4.3,3.3, body extent -3.3,-3.3 3.3,3.3, height 7.7
DIP8 [mil]
  rect 70x50 hole 28: 1(0,0)
  oval 70x50 hole 28: 2(0,-100) 3(0,-200) 4(0,-300) 5(300,-300) 6(300,-200) 7(300,-100) 8(300,0)
  silkscreen extent 50,-350 250,50
FAN_SUNON_MC3006 [mm] "fan 30 x30 x 6.9 , 5V like MC30060V1-000U-G99"
  round 1.5 hole 0.9: 1(-2,2) 2(-2,5) 3(-2,8)
  round 3.2 hole 3.2 unplated: ""(3,27) ""(3,3) ""(27,3) ""(27,27)
  silkscreen extent 1,1 29,29, body extent 0,0 30,30, height 7.2
FDV-301N_SOT23 [mm] "fet digital"
  rect 1x1.4 smd: D(0,1.1) G(-0.95,-1.1) S(0.95,-1.1)
  silkscreen extent -1.2,0.15 1.2,0.9, body extent -1.2,-0.85 1.3,0.9, height 1.5
FIDUCIAL [mm] "PCB Fiducial marker"
  round 1 smd far side paste-1 mask+1: 0(0,0)
  round 1 smd paste-1 mask+1: 1(0,0)
FIDUCIAL_PASTE [mm] "Paste Fiducial marker"
  oct 1x1 smd far side paste+0.25 mask+1: 0(0,0)
  oct 1x1 smd paste+0.25 mask+1: 1(0,0)
GPPAD [mm]
  round 1.7 hole 1: 0(0,0)
HC49 [mm]
  round 1.2 hole 0.6: 1(-2.54,0) 2(2.54,0)
  silkscreen extent -5.59,-2.03 5.59,2.03
HDR1X2 [mm]
  oct 1.5x1.6 hole 0.914: 1(0,0)
  oval 1.5x1.6 hole 0.914: 2(2.54,0)
  silkscreen extent -1.27,-1.27 3.81,1.27, body extent -1.5,-3 4,3, height 7.56
HDR1X4 [mm]
  oct 1.5x1.6 hole 0.9: 1(-3.81,0)
  oval 1.5x1.6 hole 0.9: 2(-1.27,0) 3(1.27,0) 4(3.81,0)
  silkscreen extent -5.08,-1.27 5.08,1.27, body extent -5.31,-3.4 5.3,3.4, height 7.56
HDR1X5 [mil]
  oct 62x76 hole 35.43: 1(-200,0)
  oval 62x76 hole 35.43: 2(-100,0) 3(0,0) 4(100,0) 5(200,0)
  silkscreen extent -250,-50 250,50, body extent -260,-134 260,134, height 298
HDR1X6 [mm]
  oct 1.5x1.8 hole 0.9: 1(0,0)
  oval 1.5x1.8 hole 0.9: 2(2.54,0) 3(5.08,0) 4(7.62,0) 5(10.16,0) 6(12.7,0)
  silkscreen extent -1.27,-1.27 13.97,1.27, body extent -1.5,-3 14,3, height 7.56
HDR1X8 [mil]
  oct 62x76 hole 36: 1(0,0)
  oval 62x76 hole 36: 2(100,0) 3(200,0) 4(300,0) 5(400,0) 6(500,0) 7(600,0) 8(700,0)
  silkscreen extent -50,-50 750,50, body extent -98,-118 787,118, height 55
HDR2X20_100MIL [mm] "100mil 20 x 2 header shround no ejecters"
  oct 1.5x1.5 hole 0.9: 1(0,0)
  round 1.5 hole 0.9: 2(0,2.54) 3(2.54,0) 4(2.54,2.54) 5(5.08,0) 6(5.08,2.54) 7(7.62,0) 8(7.62,2.54) 9(10.16,0) 10(10.16,2.54) 11(12.7,0) 12(12.7,2.54) 13(15.24,0) 14(15.24,2.54) 15(17.78,0) 16(17.78,2.54) 17(20.32,0) 18(20.32,2.54) 19(22.86,0) 20(22.86,2.54) 21(25.4,0) 22(25.4,2.54) 23(27.94,0) 24(27.94,2.54) 25(30.48,0) 26(30.48,2.54) 27(33,0) 28(33,2.54) 29(35.56,0) 30(35.56,2.54) 31(38.1,0) 32(38.1,2.54) 33(40.64,0) 34(40.64,2.54) 35(43.18,0) 36(43.18,2.54) 37(45.72,0) 38(45.72,2.54) 39(48.26,0) 40(48.26,2.54)
  silkscreen extent -3.26,-3.23 50.8,5.77
ODROID_C1 [mm] "odroid"
  round 4.5 hole 3.2: 0(-58,49) 0(-58,0) 0(0,49) 0(0,0)
  oct 1.5x1.5 hole 0.9: 1(-4.866,1.274)
  round 1.5 hole 0.9: 2(-4.866,-1.266) 3(-7.406,1.274) 4(-7.406,-1.266) 5(-9.946,1.274) 6(-9.946,-1.266) 7(-12.486,1.274) 8(-12.486,-1.266) 9(-15.026,1.274) 10(-15.026,-1.266) 11(-17.566,1.274) 12(-17.566,-1.266) 13(-20.106,1.274) 14(-20.106,-1.266) 15(-22.646,1.274) 16(-22.646,-1.266) 17(-25.186,1.274) 18(-25.186,-1.266) 19(-27.726,1.274) 20(-27.726,-1.266) 21(-30.266,1.274) 22(-30.266,-1.266) 23(-32.806,1.274) 24(-32.806,-1.266) 25(-35.346,1.274) 26(-35.346,-1.266) 27(-37.866,1.274) 28(-37.866,-1.266) 29(-40.426,1.274) 30(-40.426,-1.266) 31(-42.966,1.274) 32(-42.966,-1.266) 33(-45.506,1.274) 34(-45.506,-1.266) 35(-48.046,1.274) 36(-48.046,-1.266) 37(-50.586,1.274) 38(-50.586,-1.266) 39(-53.126,1.274) 40(-53.126,-1.266)
  silkscreen extent -54.4,-3.4 -3.6,3.6
QFP48_7x7 [mm] "7mm x 7mm QFP48 with no PAD"
  rrect10% 1.55x0.26 smd: 1(-4.125,2.75) 2(-4.125,2.25) 3(-4.125,1.75) 4(-4.125,1.25) 5(-4.125,0.75) 6(-4.125,0.25) 7(-4.125,-0.25) 8(-4.125,-0.75) 9(-4.125,-1.25) 10(-4.125,-1.75) 11(-4.125,-2.25) 12(-4.125,-2.75) 25(4.125,-2.75) 26(4.125,-2.25) 27(4.125,-1.75) 28(4.125,-1.25) 29(4.125,-0.75) 30(4.125,-0.25) 31(4.125,0.25) 32(4.125,0.75) 33(4.125,1.25) 34(4.125,1.75) 35(4.125,2.25) 36(4.125,2.75)
  rrect10% 0.26x1.55 smd: 13(-2.75,-4.125) 14(-2.25,-4.125) 15(-1.75,-4.125) 16(-1.25,-4.125) 17(-0.75,-4.125) 18(-0.25,-4.125) 19(0.25,-4.125) 20(0.75,-4.125) 21(1.25,-4.125) 22(1.75,-4.125) 23(2.25,-4.125) 24(2.75,-4.125) 37(2.75,4.125) 38(2.25,4.125) 39(1.75,4.125) 40(1.25,4.125) 41(0.75,4.125) 42(0.25,4.125) 43(-0.25,4.125) 44(-0.75,4.125) 45(-1.25,4.125) 46(-1.75,4.125) 47(-2.25,4.125) 48(-2.75,4.125)
  silkscreen extent -4.25,-2.95 2.95,3.57, body extent -3.5,-3.5 3.5,3.5, height 1
SL3.81/4/90G [mm]
  oval 2.134x2.54 hole 1.1: 1(0,0) 2(3.81,0) 3(7.62,0) 4(11.43,0)
  silkscreen extent -2.54,-8.3 14,1.9, body extent -2.6,-8.3 14,2, height 7
SL3.81/6/90G [mm]
  oval 2.134x2.54 hole 1.1: 1(0,0) 2(3.81,0) 3(7.62,0) 4(11.43,0) 5(15.24,0) 6(19.05,0)
  silkscreen extent -2.54,-9 21.63,1.91
SL3.81/8/90G [mm]
  oval 2.134x2.54 hole 1.2: 1(0,0) 2(3.81,0) 3(7.62,0) 4(11.43,0) 5(15.24,0) 6(19.05,0) 7(22.86,0) 8(26.67,0)
  silkscreen extent -2.54,-7.62 29.5,1.92, body extent -2.5,-7.75 29.5,2, height 7
SMA_COMPACT_VERTICAL_PCB [mm] "compact footprint sma vertical"
  round 2.5 hole 1.5: 1(-2.54,-2.54)
  round 2.54 hole 1.5: 1(-2.54,2.54) 1(2.54,-2.54) 1(2.54,2.54)
  round 2.2 / inner round 2 / far side round 2.2 hole 1.5: 2(0,0)
  silkscreen extent -4.06,-4.06 4.06,4.06, body extent -3.75,-3.75 3.75,3.75, height 10
SMA_DIODE [mm]
  rect 1.8x2.1 smd: A(0,-2.2) K(0,2.2)
  silkscreen extent -1.4,-2.3 1.4,2.4, body extent -1.5,-2.6 1.5,2.6, height 2.45
SMB_diode [mil]
  rect 70x85 smd: A(80.71,0) K(-80.71,0)
  silkscreen extent -118,-79 118,79, body extent -89,-79 89,79, height 118
SO8 [mm]
  oct 1.3x0.5 smd: 1(-2.75,1.905)
  rect 1.3x0.5 smd: 2(-2.75,0.635) 3(-2.75,-0.635) 4(-2.75,-1.905) 5(2.75,-1.905) 6(2.75,-0.635) 7(2.75,0.635) 8(2.75,1.905)
  silkscreen extent -1.06,-2.54 1.06,2.41, body extent -2.1,-2.6 2.1,2.5, height 1.5
SO8FET [mil] "SO* FET no pad, for AO4407"
  rrect50% 60x25 smd: D(102.5,75) D(102.5,-25) D(102.5,25) D(102.5,-75) G(-102.5,-75) S(-102.5,75) S(-102.5,-25) S(-102.5,25)
  silkscreen extent -62,88 -38,112, body extent -83,-102 83,99, height 59
SO16 [mm]
  oct 1.7x0.51 smd: 1(-2.35,4.445)
  rect 1.7x0.51 smd: 2(-2.35,3.175) 3(-2.35,1.905) 4(-2.35,0.635) 5(-2.35,-0.635) 6(-2.35,-1.905) 7(-2.35,-3.175) 8(-2.35,-4.445) 9(2.35,-4.445) 10(2.35,-3.175) 11(2.35,-1.905) 12(2.35,-0.635) 13(2.35,0.635) 14(2.35,1.905) 15(2.35,3.175) 16(2.35,4.445)
  silkscreen extent -0.66,-5.08 0.66,5.08
SOT23 [mm]
  rect 0.85x1.4 smd: 1(-0.95,-1.1) 2(0.95,-1.1) 3(0,1.1)
  silkscreen extent -1.2,0.15 1.2,0.9, body extent -1.2,-0.85 1.3,0.9, height 1.5
SOT223 [mm]
  rect 1.2x2.2 smd: 1(-2.3,-3.1) 2(0,-3.1) 3(2.3,-3.1)
  rect 3.6x2.2 smd: 4(0,3.1)
  silkscreen extent -3.5,-4.8 3.5,4.8
TO263-5 [mm] "TO 263 5 pin with pad on 0"
  rect 9.4x10.8 smd: 0(0,-4.575)
  rrect50% 1.1x4.6 smd: 1(3.4,4.575) 2(1.7,4.575) 3(0,4.575) 4(-1.7,4.575) 5(-3.4,4.575)
  body extent -5,-9.83 5,0.76, height 4.4
TSSOP16 [mm] "ssop16 proto, body 4mm wide"
  rect 0.32x1.6 smd: 1(-2.222,-2.8) 2(-1.587,-2.8) 3(-0.952,-2.8) 4(-0.317,-2.8) 5(0.318,-2.8) 6(0.953,-2.8) 7(1.588,-2.8) 8(2.223,-2.8) 9(2.222,2.8) 10(1.587,2.8) 11(0.952,2.8) 12(0.317,2.8) 13(-0.318,2.8) 14(-0.953,2.8) 15(-1.588,2.8) 16(-2.223,2.8)
  silkscreen extent -3.25,-1.75 -2.75,1.5, body extent -2.5,-2 2.5,2, height 1.5
USB_B_SKT_90 [mm] "USB_B_SKT_90"
  round 1.5 hole 0.9: 1(2.5,0) 2(0,0) 3(0,-2)
  round 1.6 hole 0.9: 4(2.5,-2)
  round 3 hole 2.3: 5(7.27,-4.71) 6(-4.77,-4.71)
  silkscreen extent -4.75,-15 7.25,1.5, body extent -4.75,-15 7.25,1.5, height 11
USB_UX60A-MB-5ST [mm] "USB Hirose side mnt"
  rect 2.5x2.2 smd: BODY(-4.2,8.4) BODY(-4.2,3.1) BODY(4.2,8.4) BODY(4.2,3.1)
  rect 0.5x2 smd: DM(-0.8,8.65) DP(0,8.65) GND(1.6,8.65) ID(0.8,8.65) VBUS(-1.6,8.65)
  silkscreen extent -4,0 4,9, body extent -4,0 4,9, height 3.95

## Part data
C1 C2 C3 C4 C5 C6 C7 C9 C10 C11 C12 C13 C14 C15 C16 C17 C19 C20 C21 C22 C23 C24 C25 C26 C27 C28 C29 C30 C31 C32 C33 C34 C35 C36 C37 C38 C39 C40 C41 C42 C43 C45 C46 C47 C48 C49 C52 C53 C54 C55 C56 C57: library part caps
  C9 C10 C11: DKPN=587-1778-1-ND
C8 C18: library part cap-pols, "capacitor polarized"
C44: library part CAPTRIM, "trimmer cap"
C50 C51: library part cryst
D1 D2 D4 D6 D7 D8: library part DIODE_SHOTT_AK_SMALL, "schottky"
D3: library part BAT721A-DUALDIODE_COM_ANODE_1, "dual diode series"
D5 D9 D10: library part LEDS
FID1 FID2 FID3 FID4: "fiducial mark"
J4: library part CoaxConn, "coax connector"
J11 J14 J15 J16 J17 J18: library part TESTPOINT, "test point"
J13: library part CON4
J19: library part USB_B_SKT
J20: library part USB_MiniB_molex, "USB socket miniB"
L1: library part inductorshort
L2: library part INDUCTORSHORT, "XAL4040-103"
L3 L4 L5 L6 L7 L8 L9: library part INDUCTORSHORT
PFID1 PFID2: library part FIDUCIAL_PASTE, "fiducial mark paste"
Q1: library part FDC638P, "mosfet digital"
Q2 Q3 Q4 Q5 Q6 Q7 Q8: library part MOSFET-DIGITAL-SOT-23_1, "FDV301N"
R1 R2 R3 R4 R5 R6 R7 R8 R9 R10 R11 R12 R13 R16 R17 R18 R19 R20 R21 R22 R23 R24 R25 R26 R27 R28 R29 R30 R31 R32 R33 R34 R35 R36 R37 R38 R39 R40 R41 R42 R43 R44 R45 R46 R47 R48 R49 R50 R51 R52 R53 R54 R55 R56 R57 R58 R59 R60 R61 R62 R63 R64 R65 R66 R67 R68 R69 R70 R71 R72 R73 R74 R75 R76 R77 R78 R79 R80 R81 R82 R83 R84 R85 R86 R87 R88 R89 R90: library part ress, "resistor small"
R14 R15: library part RESS, "resistor small"
U1: "12bit 2 channel 55kbps spi adc"
U2: library part XL4015, "buck regulator 4A"
U3: "3.3V rs232 transceiver"
U4: "dual sm opto Vishay"
U5: library part 24C_EEPROM, "eeprom 8 pin"
U6: library part AMS1117, "3.3V LDO"
U7: "USB audio"
U8: "microcontroller"
U9: "ftdi uart ssop16"
Y1: library part CRYSTAL
Z1: "ODROID SBC"
Z3: library part Fan_Sunon_maglev_MC3006, "sunon fan"

## Free pads (board coordinates)
  round 3.8 hole 3: ""(52.8,4.2) ""(53,95.8) ""(134.8,4.2) ""(134.8,95.8)

## Via types
v1: diameter 0.7, hole 0.3, Top Layer to Bottom Layer, tented both sides, 157 vias
v2: diameter 1, hole 0.4, Top Layer to Bottom Layer, 127 vias
v3: diameter 0.8, hole 0.4, Top Layer to Bottom Layer, tented both sides, 40 vias
v4: diameter 0.7, hole 0.3, Top Layer to Bottom Layer, 15 vias
v5: diameter 0.6, hole 0.3, Top Layer to Bottom Layer, tented both sides, 8 vias
v6: diameter 1, hole 0.3, Top Layer to Bottom Layer, 2 vias

## Nets (pads, with @x,y where several pads share a name; then routed paths per layer and width w, separated by ;. In a path a pad name is that pad's centre, name@x,y a point inside that pad or via, vN(x,y) a via of type N, cw(c..) or ccw(c..) an arc to the next point about the centre after c; other vN are vias at no path point)
3V3: C12.1 C15.1 C34.1 C39.2 C40.1 D9.A R23.1 R40.1 R42.1 R47.1 R48.1 R55.1 R56.1 R66.1 U1.1 U1.8 U3.16 U5.8 U6.2 U6.4 U8.8 | length 91.1
  Top Layer w0.2: D9.A@46.565,62.4 46.565,61.635 47,61.2 49.4,61.2 49.8,61.6 v1(54.4,61.6) R40.1@55.4,61.6 R40.1@55.4,61.4 ; v1(46.8,78) R23.1@47.6,78 ; v1(55,8.8) R42.1@55.8,8.8 55.8,6.6 56.2,6.2 63.8,6.2 63.8,8.8 62.2,10.4 60.6,10.4 60,11 U8.8@60,15.22 ; U5.8@58.95,59.905 C39.2@58.95,60.95 ; C40.1@60,17.6 v1(61,17.6) ; R47.1@61.2,55.2 58,55.2 56.6,56.6 56.6,59.4 58.15,60.95 C39.2@58.95,60.95 ; R48.1@61.2,59.8 60.6,59.8 60,60.4 v1(60,61.2) C39.2@59.2,61.2 C39.2@58.95,60.95 ; v1(64.4,64.2) R55.1@65.4,64.2 ; R56.1@65.6,93.4 60.2,93.4 59.4,92.6 59.4,90 62.8,86.6 69.8,86.6 v1(71.2,88)
  Top Layer w0.3: U1.8@26.02,93.2 26.22,93.4 C12.1@28,93.4 ; v1(33,36) C15.1@33,36.8 33.25,37.05 U3.16@33.25,38.555 ; v1(71.2,88) R66.1@72,88
  Top Layer w0.5: C34.1@53.2,30.4 v1(54,30.4) 54.2,30.4 55,29.6 U6.2@55.9,29.6 v1(57.6,29.6) U6.4@62.1,29.6 ; U8.8@60,15.22 C40.1@60,17.6
5V: C13.1 C14.1 C16.1 C17.1 C18.1 C26.1 C33.1 C49.1 C57.1 D8.K L2.2 Q1.S R16.1 R20.1 R36.1 R39.1 R60.2 R64.2 R65.2 R84.1 R89.1 U6.3 U9.12 | length 337.2
  Top Layer w0.2: R36.1@53.2,24.4 53.2,23.6 53.365,23.435 ; Q1.S@53.365,22.263 53.428,22.2 R39.1@55.4,22.2 ; R84.1@140.6,67.6 142.4,65.8 v4(146.4,65.8) 147,65.8 147.4,66.2 147.4,69 147,69.4 R89.1@146.4,69.4 ; U9.12@145,80.682 146.518,80.682 C57.1@146.6,80.6
  Top Layer w0.3: v4(43.4,68.2) R20.1@44.2,68.2 ; v4(45,53) 66.8,53 v4(67,52.8) ; 54.4,25 65.4,25 66.4,26 68.6,26 69,25.6 C49.1@69,25 69.2,24.8 v4(69.8,24.8) R65.2@71.75,24.8 R64.2@71.75,22.6 ; R60.2@69.6,78.2 v4(69.6,79.4)
  Top Layer w0.4: v4(146.4,73.8) 147.4,74.8 147.4,80.6 C57.1@146.6,80.6
  Top Layer w0.5: R36.1@53.2,24.4 54.4,24.4 54.4,25 54.4,27.4 ; C33.1@53.2,27.4 54.4,27.4 ; U6.3@55.9,27.3 55.8,27.4 54.4,27.4
  Top Layer w0.6: D8.K@46.8,23.2 48,24.4 C26.1@49.2,24.4 49.8,24.4 50.765,23.435 ; Q1.S@50.765,22.203 50.765,23.435 ; Q1.S@52.035,22.203 52.035,23.365 51.965,23.435 ; Q1.S@53.305,22.203 53.365,22.263 53.365,23.435 51.965,23.435 ; 50.765,23.435 51.965,23.435
  Bottom Layer w0.3: v4(43.4,68.2) 43.4,59.6 45,58 v4(45,53) 45,33.8 50.2,28.6 50.2,25.8 46.8,22.4 v4(46.8,22) v4(46.8,21) ; v4(67,52.8) 67,68.2 69.6,70.8 v4(69.6,79.4)
  Bottom Layer w0.4: 132.2,7.6 144,7.6 146.4,10 v4(146.4,65.8) v4(146.4,73.8)
  Bottom Layer w0.5: v4(46.6,19) v4(47.4,19) 49.4,19 58,10.4 68.4,10.4 72.8,6 130.6,6 132.2,7.6
ADCCK: U1.7 Z2.19 | length 93.2
  Top Layer w0.2: U1.7@26.02,90.66 57.74,90.66 62.4,86 77.2,86 v1(77.2,85.4) ; v1(80.2,85.4) v1(108.8,85.4)
  Bottom Layer w0.2: v1(77.2,85.4) v1(80.2,85.4) ; Z2.19@107.327,78.126 108.6,79.399 108.6,85.2 v1(108.8,85.4)
ADCCS: U1.5 Z2.13 | length 83.9
  Top Layer w0.2: U1.5@26.02,85.58 27.6,87.16 27.6,88.6 28.4,89.4 56.8,89.4 61.4,84.8 75.2,84.8 77.2,82.8 v1(77.2,82.4) ; v1(80.2,82.4) 81.6,83.8 95,83.8 v1(95.8,83)
  Bottom Layer w0.2: v1(77.2,82.4) v1(80.2,82.4) ; v1(95.8,83) 95.8,80 96.4,79.4 98.433,79.4 Z2.13@99.707,78.126
ADCDO: U1.6 Z2.15 | length 85.6
  Top Layer w0.2: U1.6@26.02,88.12 27.9,90 57.4,90 62,85.4 75.6,85.4 v1(77.2,83.8) ; v1(80.2,83.8) 81,84.6 v1(101,84.6)
  Bottom Layer w0.2: v1(77.2,83.8) v1(80.2,83.8) ; v1(101,84.6) 101,79.4 102.247,78.153 Z2.15@102.247,78.126
AUD_N: R63.1 U7.10 | length 7.2
  Top Layer w0.2: U7.10@63.475,70.95 64.35,70.95 64.4,70.9 67.619,70.9 68.719,72 69.4,72 R63.1@70,72.6
AUD_P: R62.1 U7.9 | length 7.2
  Top Layer w0.2: U7.9@63.475,70.45 64.35,70.45 64.4,70.5 67.785,70.5 68.885,71.6 69.6,71.6 R62.1@70,71.2
AUSD_N: J20.DM R63.2 | length 106.7
  Top Layer w0.2: R63.2@71.6,72.6 71.6,74 71.4,74.2 71.4,75.2 72,75.8 78.366,75.8 79,76.434 79,94 79.4,94.4 131.6,94.4 134,92 148,92 151.8,88.2 153.2,88.2 153.4,88 J20.DM@154.55,88
AUSD_P: J20.DP R62.2 | length 109.4
  Top Layer w0.15: 70.8,73.2 70.8,71.6 71,71.4 71.4,71.4 R62.2@71.6,71.2
  Top Layer w0.2: 70.8,73.2 70.8,74 71,74.2 71,75.366 71.834,76.2 78.2,76.2 78.6,76.6 78.6,94.166 79.234,94.8 131.766,94.8 134.166,92.4 148.166,92.4 151.966,88.6 153.2,88.6 153.4,88.8 J20.DP@154.55,88.8
BI: D1.A J2.3 | length 7
  Top Layer w0.5: J2.3@3,14.18 3.22,14.18 D1.A@8,9.4
BO: D4.K J2.2 | length 12.3
  Top Layer w0.5: J2.2@3,17.99 4.39,17.99 6,19.6 9.6,19.6 9.8,19.8 12,19.8 12.8,19 D4.K@12.8,17.6
CBUS0: Q8.G R87.2 U9.15 | length 20.1
  Top Layer w0.2: Q8.G@144.55,69.3 144.55,70.55 v1(144.6,70.6) ; U9.15@145,82.587 143.813,82.587 143.6,82.8 143.6,83.6 143.8,83.8 144.6,83.8 v1(145,84.2) 145.2,84.4 R87.2@145.2,85.2
  Bottom Layer w0.2: v1(144.6,70.6) 144.6,83.8 v1(145,84.2)
CTSN: J13.4 U9.6 | length 60.7
  Top Layer w0.2: J13.4@91.01,91.2 92.2,91.2 93.6,92.6 128.4,92.6 130.8,90.2 v1(135.6,90.2) ; v1(135.6,79.6) 138.034,79.6 138.482,80.047 U9.6@139.4,80.047
  Bottom Layer w0.2: v1(135.6,79.6) v1(135.6,90.2)
D_N: C56.2 J19.2 R86.2 | length 11.6
  Top Layer w0.2: C56.2@144.6,75.8 R86.2@143.2,75.8 142.6,75.2 142.6,73 143.6,72 148.2,72 J19.2@149,72.8
D_P: C55.2 J19.3 R85.2 | length 14.5
  Top Layer w0.2: C55.2@140,75.8 R85.2@141.4,75.8 141.5,75.7 142.2,75 142.2,72.834 143.434,71.6 149.8,71.6 J19.3@151,72.8
FRXD: J13.3 R81.1 U3.12 | length 156.8
  Top Layer w0.15: 36.8,43 39.4,43 39.6,42.8 41.2,42.8
  Top Layer w0.2: U3.12@33.25,43.635 35.165,43.635 35.8,43 36.8,43 ; 41.2,42.8 42.4,44 42.4,45.4 43,46 85,46 85.4,45.6 86.2,45.6 87.2,46.6 v1(88.2,46.6) ; J13.3@88.47,91.2 88.47,90.33 89.2,89.6 92,89.6 94.6,92.2 128,92.2 130.4,89.8 134,89.8 137.6,86.2 R81.1@137.8,86.2
  Bottom Layer w0.2: v1(88.2,46.6) 88.2,90.93 J13.3@88.47,91.2
FSHDN: R57.1 R79.2 | length 151.8
  Top Layer w0.2: R57.1@67,22.8 68,22.8 68.6,22.2 68.6,19.6 70,18.2 70,5.8 70.2,5.6 125.566,5.6 128.583,8.617 128.583,13.383 129.2,14 v1(131.6,14) ; v1(136.6,75.2) 137.2,75.2 R79.2@137.8,75.8
  Bottom Layer w0.2: v1(131.6,14) 131.6,49.6 132.4,50.4 132.4,51.4 132,51.8 132,56 134,58 134,69 136.6,71.6 v1(136.6,75.2)
FT3V3: C54.1 U9.3 U9.10 U9.11 | length 12
  Top Layer w0.2: C54.1@137.6,82.2 137.848,81.952 U9.3@139.4,81.952 140.752,81.952 v1(140.8,82) ; v1(143,80) 143.588,79.412 U9.10@145,79.412 146.212,79.412 146.4,79.6 146.4,79.8 146.25,79.95 U9.11@145,79.95 ; U9.11@144.95,80 U9.11@145,79.95 ; U9.11@145,80.047 U9.11@145,79.95
  Bottom Layer w0.2: v1(140.8,82) 141.2,82 143,80.2 v1(143,80)
FTDM: R86.1 U9.9 | length 3
  Top Layer w0.2: R86.1@143.2,77.4 143.2,78.4 143.577,78.777 U9.9@145,78.777
FTDP: R85.1 U9.8 | length 3
  Top Layer w0.2: U9.8@139.4,78.777 140.823,78.777 141.4,78.2 R85.1@141.4,77.4